# Altium PCB DCDC-Converter V1.0.PcbDoc
Units mm, origin at the board's own origin, x right, y up, seen from the top; angles counter-clockwise.
Board outline 130 x 100 mm, 2 copper layers (Top Layer, Bottom Layer); 36 components, 23 nets, 160 pads, 243 vias.
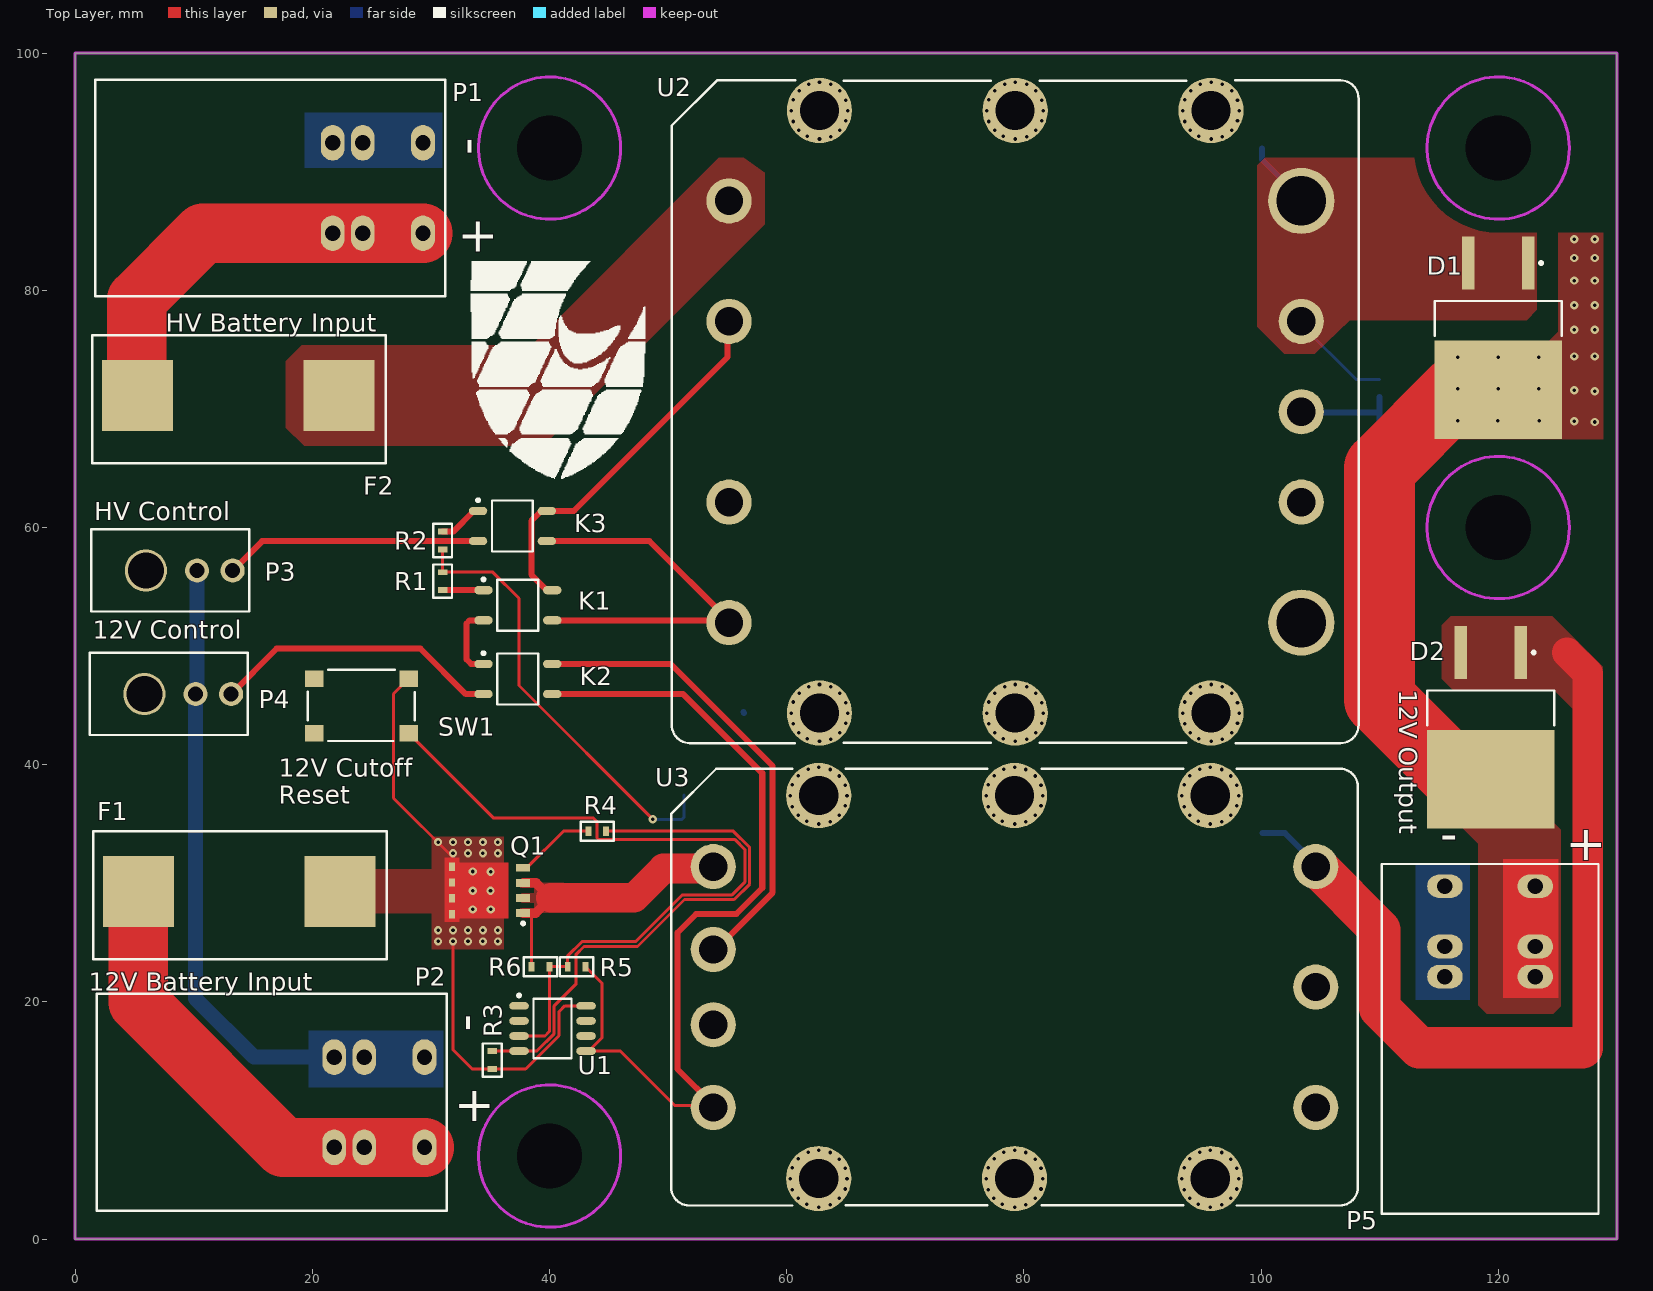
[diagram p0: Top Layer view]
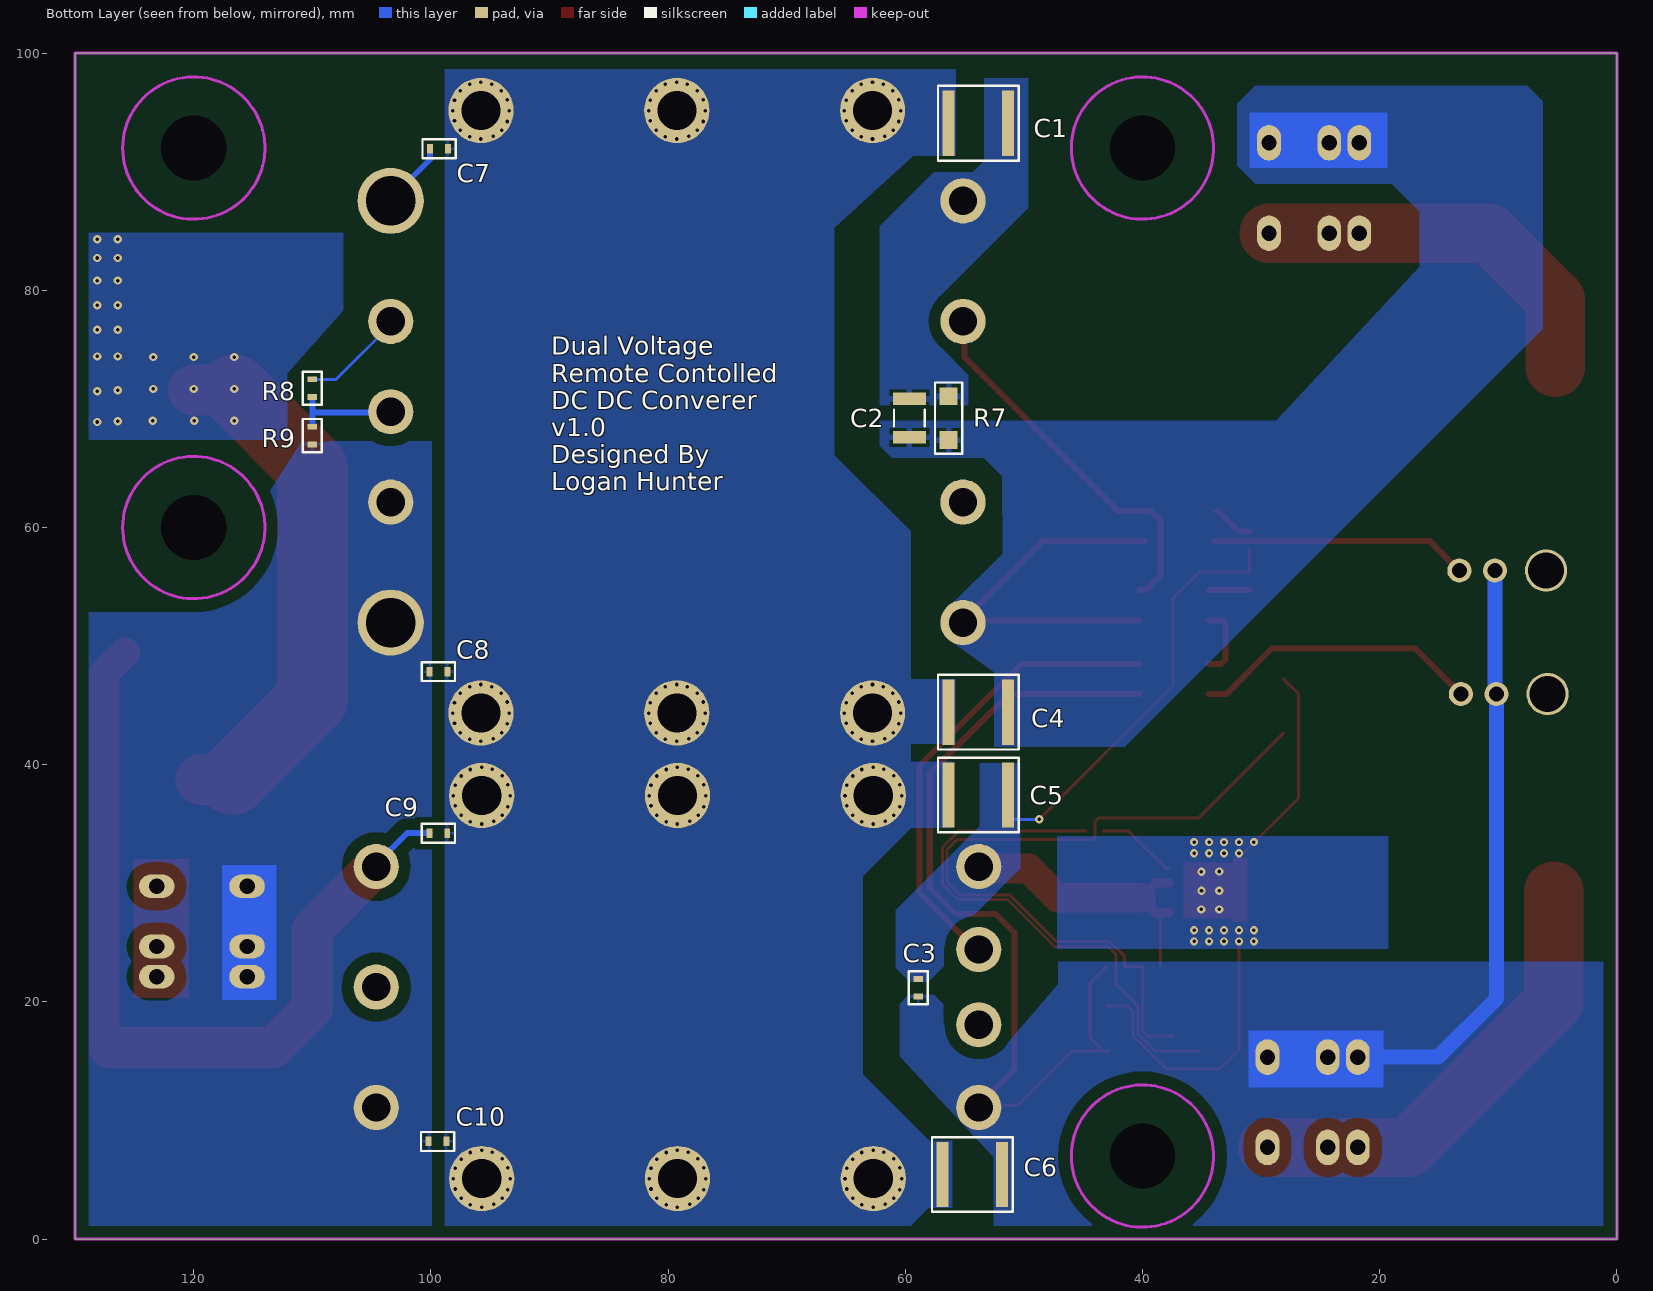
[diagram p1: Bottom Layer view, seen from below]
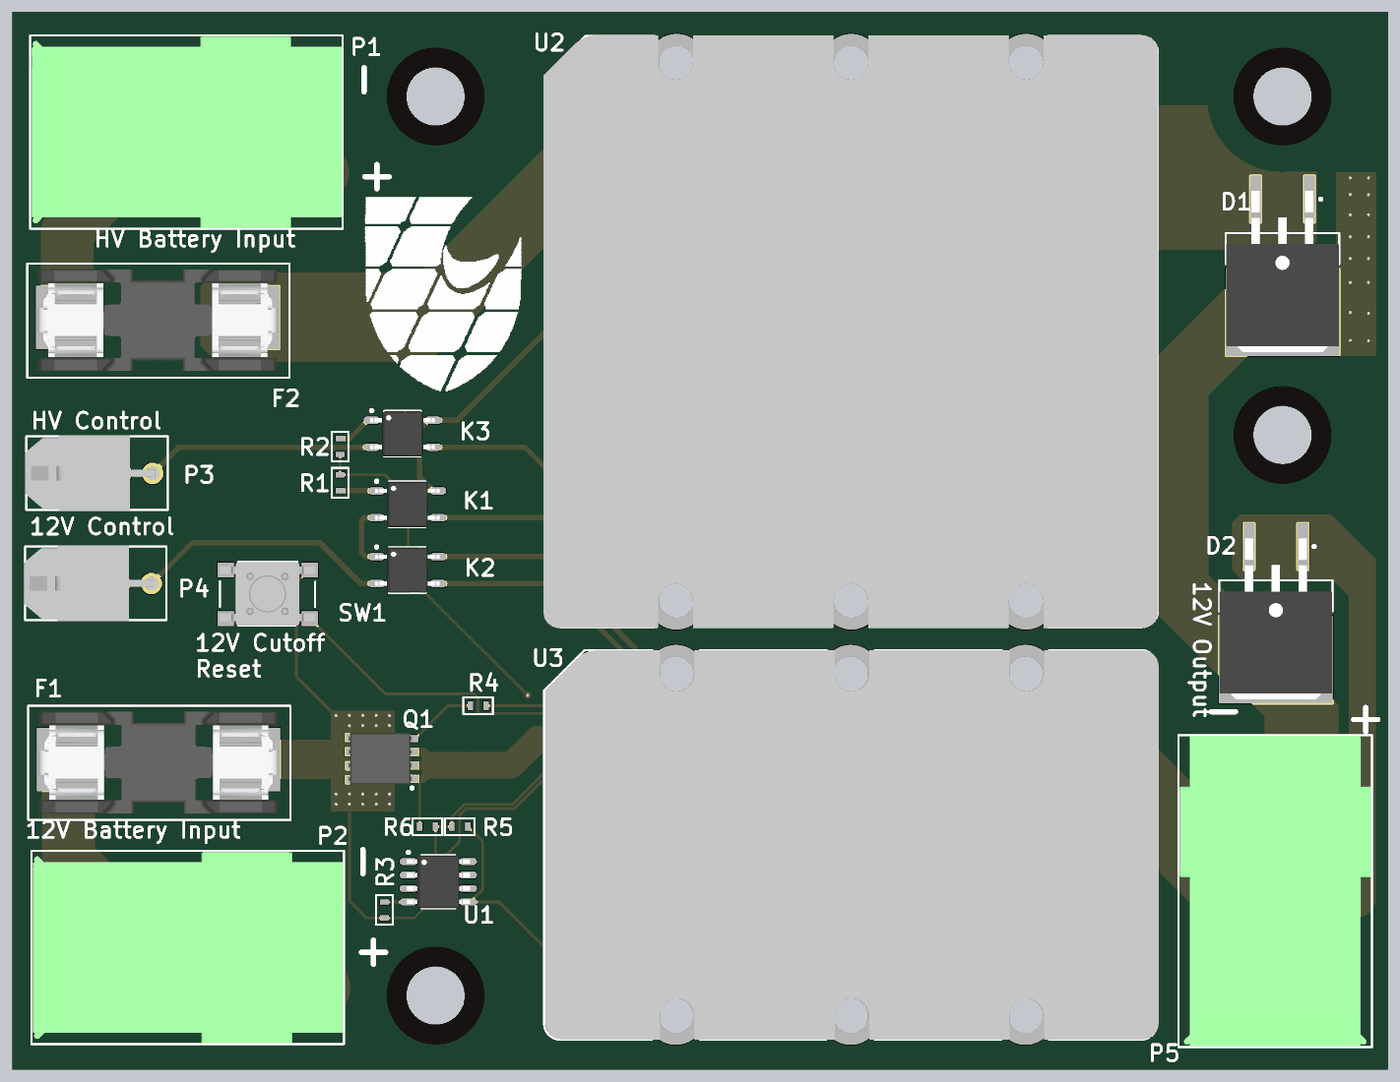
[diagram p2: 3D render of the assembled board from above, using the file's embedded part models]

## Layer stack, top to bottom
Top Solder: solder mask 0.0102, Solder Resist, Dk 3.5
Top Layer: signal copper 0.0356
Dielectric 1: dielectric 0.32, FR-4, Dk 4.8
Bottom Layer: signal copper 0.0356
Bottom Solder: solder mask 0.0102, Solder Resist, Dk 3.5

## Board outline
0,0 130,0 130,100 0,100

## Design rules (kind name [scope] priority, off if disabled: settings)
BoardOutlineClearance [All] p1: gap=0.3
Clearance [All] p1: gap=0.152 except(1: Arc-Poly Track-Poly SMDPad-Poly THPad-Poly Via-Poly Fill-Poly Poly-Poly)
ComponentClearance [All] p1: gap=0.1 collisioncheckmode=3 verticalgap=0.254 showdistances=FALSE
FabricationTestPointUsage TestPointUsage [All] p1: valid=0 allowmultiple=FALSE
FabricationTestpoint Testpoint [All] p1: side=3 testpointundercomponent=TRUE minsize=1.016 maxsize=2.54 preferedsize=1.524 minholesize=0 maxholesize=1.016 preferedholesize=0.813 testpointgrid=0.025 allowsidetop=TRUE allowsidebottom=TRUE usegrid=TRUE gridtolerance=0
HoleSize [All] p1: absolutevalues=TRUE maxlimit=6.3 minlimit=0.3 maxpercent=80.000 minpercent=20.000
HoleToHoleClearance [All] p1: gap=0.45 allowstackedmicrovias=TRUE
MinimumAnnularRing [All] p1: minimumring=0.15
MinimumSolderMaskSliver [All] p1: minsoldermaskwidth=0.075
PlaneClearance [All] p1: clearance=0.5
PlaneConnect [All] p1: planeconnectstyle=Direct reliefexpansion=0.508 reliefentries=4 reliefconductorwidth=0.254 reliefairgap=0.254
PolygonConnect FET-nothermal [InNet('VAUX+PASS')] p1: connectstyle=Direct reliefconductorwidth=0.254 reliefentries=4 polygonreliefangle="90 Angle" airgapwidth=0.254
PolygonConnect PolygonConnect-Via [isVia] p2: connectstyle=Direct reliefconductorwidth=0.254 reliefentries=4 polygonreliefangle="90 Angle" airgapwidth=0.254
PolygonConnect "PolygonConnect Fat No Thermals" [isPad && (not(IsThruPin)) && ((PadXSize_TopLayer * PadYSize_TopLayer) > 4)] p3: connectstyle=Direct reliefconductorwidth=0.254 reliefentries=4 polygonreliefangle="90 Angle" airgapwidth=0
PolygonConnect PolygonConnect-ThruPin [(IsThruPin && (HoleDiameter > 2))] p4: connectstyle=Direct reliefconductorwidth=0.5 reliefentries=4 polygonreliefangle="90 Angle" airgapwidth=0.25
PolygonConnect PolygonConnect-LargerThermals [isPad && (PadXSize_AllLayers * PadYSize_AllLayers) > 1] p5: connectstyle=Relief reliefconductorwidth=0.5 reliefentries=4 polygonreliefangle="90 Angle" airgapwidth=0.25 // GND Via Connection
PolygonConnect "GND Via" [isVia AND InNet('GND')] p6: connectstyle=Direct reliefconductorwidth=0.254 reliefentries=4 polygonreliefangle="90 Angle" airgapwidth=0.254 // GND Via Connection
PolygonConnect [All] p7: connectstyle=Relief reliefconductorwidth=0.25 reliefentries=4 polygonreliefangle="90 Angle" airgapwidth=0.25
RoutingVias [All] p1: holewidth=0.3 width=0.6 viastyle="Through Hole" minholewidth=0.3 minwidth=0.6 maxholewidth=6.3 maxwidth=6.6
SilkToSilkClearance [All] p1: silktosilkclearance=0.15
SilkToSolderMaskClearance SilkscreenOverComponentPads [IsPad] p1: minsilkscreentomaskgap=0.25 clearancetoexposedcopper=TRUE
SolderMaskExpansion [All] p1: expansion=0.1
Width [All] p1: maxlimit=10 minlimit=0.152 preferedwidth=0.25 minimp=50.000000 maximp=50.000000 favimp=50.000000
20 further rules are at their usual default settings.

## Classes and differential pairs
component class "DCDC Converter": C1 C3 C4 C5 C6 C7 C8 C9 C10 D1 D2 F1 F2 K1 K2 K3 P1 P2 P3 P4 P5 Q1 R1 R2 R3 R5 R6 R8 R9 SW1 U1 U2 U3

## Components (designator, comment, footprint, x,y, rotation, side; value= is the part's Value field where it differs from the comment)
C1 "X1-Y2 Capacitor" "Murata 2220 X1-Y2 Capacitor" 53.842,94.087 r0 bottom
C2 "SCH_GENERIC_CAPACITOR_1210" PCB_GENERIC_CAPACITOR_1210 59.65,69.225 r90 bottom
C3 "SCH_GENERIC_CAPACITOR_0603" PCB_GENERIC_SMD_0603 58.922,21.189 r90 bottom
C4 "X1-Y2 Capacitor" "Murata 2220 X1-Y2 Capacitor" 53.842,44.43 r180 bottom
C5 "X1-Y2 Capacitor" "Murata 2220 X1-Y2 Capacitor" 53.842,37.445 r0 bottom
C6 "X1-Y2 Capacitor" "Murata 2220 X1-Y2 Capacitor" 54.35,5.441 r180 bottom
C7 "SCH_GENERIC_CAPACITOR_0603" PCB_GENERIC_SMD_0603 99.314,91.948 r180 bottom
C8 "SCH_GENERIC_CAPACITOR_0603" PCB_GENERIC_SMD_0603 99.365,47.854 r0 bottom
C9 "SCH_GENERIC_CAPACITOR_0603" PCB_GENERIC_SMD_0603 99.375,34.225 r180 bottom
C10 "SCH_GENERIC_CAPACITOR_0603" PCB_GENERIC_SMD_0603 99.441,8.23 r0 bottom
D1 "SM74611 Smart Bypass Diode - TI" "SM74611 Smart Bypass Diode - TI" 120,76 r270 top
D2 "SM74611 Smart Bypass Diode - TI" "SM74611 Smart Bypass Diode - TI" 119.374,43.16 r270 top
F1 "Fuse" "Schurter 5x20mm Fuse Holder" 5.328,29.317 r0 top
F2 "Fuse" "Schurter 5x20mm Fuse Holder" 5.25,71.125 r0 top
K1 "SPST-NC Solid State Relay" "SPST-NC Solid State Relay - IXYS" 37.332,53.447 r0 top
K2 "SPST-NC Solid State Relay" "SPST-NC Solid State Relay - IXYS" 37.332,47.224 r0 top
K3 "SPST-NC Solid State Relay" "SPST-NC Solid State Relay - IXYS" 36.875,60.125 r0 top
P1 "Phoenix Contact 1720466" "Phoenix Contact 1720466" 29.331,84.816 r90 top
P2 "Phoenix Contact 1720466" "Phoenix Contact 1720466" 29.458,7.727 r90 top
P3 "SCH_MLX_1X2" PCB_MLX_MICROFIT_1X2 7.995,56.368 r270 top
P4 "SCH_MLX_1X2" PCB_MLX_MICROFIT_1X2 7.868,45.954 r270 top
P5 "Phoenix Contact 1720466" "Phoenix Contact 1720466" 123.125,29.75 r180 top
Q1 "INFINEON BSC030P03NS3 G" "BSC030P03NS3 G" 34.773,29.396 r0 top
R1 "SCH_GENERIC_RESISTOR_0603" PCB_GENERIC_SMD_0603 30.982,55.479 r90 top
R2 "SCH_GENERIC_RESISTOR_0603" PCB_GENERIC_SMD_0603 30.982,58.908 r270 top
R3 "SCH_GENERIC_RESISTOR_0603" PCB_GENERIC_SMD_0603 35.173,15.093 r270 top
R4 "SCH_GENERIC_RESISTOR_0603" PCB_GENERIC_SMD_0603 44.025,34.4 r180 top
R5 "SCH_GENERIC_RESISTOR_0603" PCB_GENERIC_SMD_0603 42.285,22.967 r0 top
R6 "SCH_GENERIC_RESISTOR_0603" PCB_GENERIC_SMD_0603 39.237,22.967 r180 top
R7 "SCH_GENERIC_RESISTOR_1206" PCB_GENERIC_SMD_1206 55.3,66.325 r90 bottom
R8 "SCH_GENERIC_RESISTOR_0603" PCB_GENERIC_SMD_0603 110,71.75 r90 bottom
R9 "SCH_GENERIC_RESISTOR_0603" PCB_GENERIC_SMD_0603 110,67.75 r90 bottom
SW1 "Tactile Switch" "C&K 4 pin Tactile Switch" 28.125,47.25 r180 top
U1 "Maxim MAX8212" "Maxim MAX8212" 40.253,17.76 r0 top
U2 "Vicor Mini" Vicor_Mini 79.265,69.762 r0 top
U3 "Vicor Micro" Vicor_Micro 79.209,21.248 r0 top

## Footprints (in the part's own frame and the unit in brackets; to place one, negate y for a bottom-side part, rotate by r counter-clockwise, add the part's x,y. Pads: shape width x height; smd on the part's side, far side on the other; paste and mask are expansions set on the pad)
"BSC030P03NS3 G" [mm] "P-Channel 30V 25.4A (Ta), 100A (Tc) 2.5W (Ta), 125W (Tc) Surface Mount PG-TDSON-8"
  rect 1.2x0.65 smd: 1(3,-1.905) 2(3,-0.635) 3(3,0.635) 4(3,1.905)
  rect 0.5x0.703 smd: 5(-3,1.999) 6(-3,0.666) 7(-3,-0.666) 8(-3,-1.999)
  Top Layer region: -2.75,-2.35 1.75,-2.35 1.75,2.35 -2.75,2.35
  silkscreen extent 2.88,-2.9 3.13,-2.65, body extent -3,-2.45 3,2.45, height 1
"C&K 4 pin Tactile Switch" [mm] "Digikey: CKN9085CT-ND MFG: PTS645SH50SMTR92 LFS"
  rect 1.55x1.4 smd mask+0.1: 1(0,4.6)
  rect 1.55x1.4 smd: 2(7.95,4.6) 3(0,0) 4(7.95,0)
  silkscreen extent -0.5,-0.75 8.5,5.25, body extent -0.5,-0.72 8.5,5.28, height 5
"Maxim MAX8212" [mm] "MFG: MAX8212CSA+ Digikey:  MAX8212CSA+-ND"
  oval 1.65x0.65 smd: 1(-2.825,1.905) 2(-2.825,0.635) 3(-2.825,-0.635) 4(-2.825,-1.905) 5(2.825,-1.905) 6(2.825,-0.635) 7(2.825,0.635) 8(2.825,1.905)
  silkscreen extent -2.95,-2.5 1.6,2.9, body extent -3,-2.5 3,2.5, height 1.75
"Murata 2220 X1-Y2 Capacitor" [mm] "Digikey: 490-3482-1-ND / MFG: GA355DR7GF472KW01L"
  rect 1x5.5 smd: 1(-2.5,0) 2(2.5,0)
  silkscreen extent -3.4,-3.15 3.4,3.15, body extent -2.84,-2.5 2.86,2.5, height 2
PCB_GENERIC_CAPACITOR_1210 [mm] "Chip Capacitor, 2-Leads, Body 3.20x2.50mm, IPC Medium Density"
  rect 1.05x2.8 smd: 1(-1.625,0) 2(1.625,0)
  silkscreen extent -0.7,-1.3 0.7,1.3, body extent -1.8,-1.4 1.8,1.4, height 2.2
PCB_GENERIC_SMD_0603 [mm]
  rect 0.5x0.8 smd: 1(-0.75,0) 2(0.75,0)
  silkscreen extent -1.4,-0.8 1.4,0.8, body extent -0.75,-0.5 0.75,0.5, height 0.45
PCB_GENERIC_SMD_1206 [mm] "Generic 1206 SMD footprint"
  rect 1.5x1.5 smd: 1(1.05,1.05) 2(4.75,1.05)
  silkscreen extent -0.1,-0.1 5.9,2.2
PCB_MLX_MICROFIT_1X2 [mil]
  round 80 hole 50: 1(0,90) 2(0,208)
  round 140 hole 120: ""(0,-80)
  silkscreen extent -138,-262 136,264, body extent -141,-266 140,216, height 345
"Phoenix Contact 1720466" [mm] "Digikey: 277-6070-ND / MFG: 1720466"
  oval 3x2 hole 1.3: 1(0,7.62) 1(0,5.08) 1(0,0) 2(7.62,0) 2(7.62,5.08) 2(7.62,7.62)
  silkscreen extent -5.33,-1.88 12.95,27.62, body extent -5.21,-1.78 12.83,27.47, height 14.26
"Schurter 5x20mm Fuse Holder" [mm] "MFG: 0031.8221, Digikey: 486-1260-ND"
  rect 6x6 smd: 1(0,0) 2(17,0)
  silkscreen extent -3.81,-5.71 20.95,5.08, body extent -2.84,-5.08 19.86,4.52, height 12
"SM74611 Smart Bypass Diode - TI" [mm] "Digikey: 296-35688-1-ND / MFG: SM74611KTTR"
  rect 4.45x1.05 smd: 1(-6.3,2.54) 3(-6.3,-2.54)
  rect 8.3x10.75 smd: 4(4.4,0)
  silkscreen extent -6.42,-5.35 -0.15,5.35, body extent -7.07,-5.33 8.17,5.33, height 5.08
"SPST-NC Solid State Relay - IXYS" [mm] "Digikey: CLA268CT-ND / MFG: CPC1117NTR"
  oval 1.55x0.7 smd: 1(-2.9,1.27) 2(-2.9,-1.27) 3(2.9,-1.27) 4(2.9,1.27)
  silkscreen extent -3.02,-2.15 1.73,2.3, body extent -3.05,-2.15 3.05,2.15, height 2.18
Vicor_Micro [mm]
  round 5.5 smd: 0(-16.51,-16.15) 0(-16.51,16.15) 0(0,-16.15) 0(0,16.15) 0(16.51,-16.15) 0(16.51,16.15)
  round 0 hole 3.3 unplated: 0(-16.51,-16.15) 0(-16.51,16.15) 0(0,-16.15) 0(0,16.15) 0(16.51,-16.15) 0(16.51,16.15)
  round 5.5 smd far side: 0(-16.51,-16.15) 0(-16.51,16.15) 0(0,-16.15) 0(0,16.15) 0(16.51,-16.15) 0(16.51,16.15)
  round 3.81 hole 2.388: 1(-25.4,10.16) 2(-25.4,3.175) 3(-25.4,-3.175) 4(-25.4,-10.16) 5(25.4,-10.16) 6(25.4,0) 7(25.4,10.16)
  silkscreen extent -28.96,-18.41 28.96,18.41, body extent -28.83,-18.41 29.08,18.41, height 12.7
Vicor_Mini [mm]
  round 5.5 smd: 0(-16.51,-25.4) 0(-16.51,25.4) 0(0,-25.4) 0(0,25.4) 0(16.51,-25.4) 0(16.51,25.4)
  round 0 hole 3.3 unplated: 0(-16.51,-25.4) 0(-16.51,25.4) 0(0,-25.4) 0(0,25.4) 0(16.51,-25.4) 0(16.51,25.4)
  round 5.5 smd far side: 0(-16.51,-25.4) 0(-16.51,25.4) 0(0,-25.4) 0(0,25.4) 0(16.51,-25.4) 0(16.51,25.4)
  round 3.81 hole 2.388: 1(-24.13,17.78) 2(-24.13,7.62) 3(-24.13,-7.62) 4(-24.13,-17.78) 6(24.13,-7.62) 7(24.13,0) 8(24.13,7.62)
  round 5.588 hole 4.166: 5(24.13,-17.78) 9(24.13,17.78)
  silkscreen extent -28.96,-27.94 28.96,27.94, body extent -29.08,-28.02 29,28.02, height 12.71

## Part data
C1 C4 C5 C6: library part "Murata 2220 X1-Y2 Capacitor"
C2: "Generic SMD capacitor 1210"
C3 C7 C8 C9 C10: "Generic SMD capacitor 0603"
Q1: library part "BSC030P03NS3 G", "P-Channel 30V 25.4A (Ta), 100A (Tc) 2.5W (Ta), 125W (Tc) Surface Mount PG-TDSON-8"
R1 R2 R3 R4 R5 R6 R8 R9: "Generic SMD resistor 0603"
R7: "Generic SMD resistor 1206"
SW1: library part "C&K Tactile Switch"

## Free pads (board coordinates)
  round 0 hole 5.5 unplated: ""(40,7) ""(40,92) ""(120,60) ""(120,92)

## Via types
v1: diameter 0.7, hole 0.3, Top Layer to Bottom Layer, 192 vias
v2: diameter 0.7, hole 0.3, Top Layer to Bottom Layer, tented both sides, 51 vias

## Nets (pads, with @x,y where several pads share a name; then routed paths per layer and width w, separated by ;. In a path a pad name is that pad's centre, name@x,y a point inside that pad or via, vN(x,y) a via of type N, cw(c..) or ccw(c..) an arc to the next point about the centre after c; other vN are vias at no path point)
CHASSIS: C1.2 C4.1 C5.2 C6.1 C7.2 C8.1 C9.2 C10.1 U2.0 U3.0 | length 0.1
  Bottom Layer w0.508: C4.1 C4.1@56.397,44.375
  other v1: 62.709,2.698 79.219,2.698 95.729,2.698 63.659,2.898 80.169,2.898 96.679,2.898 61.684,2.923 78.194,2.923 94.704,2.923 60.959,3.448 64.434,3.448 77.469,3.448 80.944,3.448 93.979,3.448 97.454,3.448 60.484,4.173 76.994,4.173 93.504,4.173 64.934,4.223 81.444,4.223 97.954,4.223 60.309,5.073 65.084,5.073 76.819,5.073 81.594,5.073 93.329,5.073 98.104,5.073 64.934,5.973 81.444,5.973 97.954,5.973 60.484,6.023 76.994,6.023 93.504,6.023 64.434,6.748 80.944,6.748 97.454,6.748 60.984,6.773 77.494,6.773 94.004,6.773 63.659,7.298 80.169,7.298 96.679,7.298 61.809,7.323 78.319,7.323 94.829,7.323 62.709,7.498 79.219,7.498 95.729,7.498 62.709,34.998 79.219,34.998 95.729,34.998 63.659,35.198 80.169,35.198 96.679,35.198 61.684,35.223 78.194,35.223 94.704,35.223 60.959,35.748 64.434,35.748 77.469,35.748 80.944,35.748 93.979,35.748 97.454,35.748 60.484,36.473 76.994,36.473 93.504,36.473 64.934,36.523 81.444,36.523 97.954,36.523 60.309,37.373 65.084,37.373 76.819,37.373 81.594,37.373 93.329,37.373 98.104,37.373 64.934,38.273 81.444,38.273 97.954,38.273 60.484,38.323 76.994,38.323 93.504,38.323 64.434,39.048 80.944,39.048 97.454,39.048 60.984,39.073 77.494,39.073 94.004,39.073 63.659,39.598 80.169,39.598 96.679,39.598 61.809,39.623 78.319,39.623 94.829,39.623 62.709,39.798 79.219,39.798 95.729,39.798 62.765,41.962 79.275,41.962 95.785,41.962 63.715,42.162 80.225,42.162 96.735,42.162 61.74,42.187 78.25,42.187 94.76,42.187 61.015,42.712 64.49,42.712 77.525,42.712 81,42.712 94.035,42.712 97.51,42.712 60.54,43.437 77.05,43.437 93.56,43.437 64.99,43.487 81.5,43.487 98.01,43.487 60.365,44.337 65.14,44.337 76.875,44.337 81.65,44.337 93.385,44.337 98.16,44.337 64.99,45.237 81.5,45.237 98.01,45.237 60.54,45.287 77.05,45.287 93.56,45.287 64.49,46.012 81,46.012 97.51,46.012 61.04,46.037 77.55,46.037 94.06,46.037 63.715,46.562 80.225,46.562 96.735,46.562 61.865,46.587 78.375,46.587 94.885,46.587 62.765,46.762 79.275,46.762 95.785,46.762 62.765,92.762 79.275,92.762 95.785,92.762 63.715,92.962 80.225,92.962 96.735,92.962 61.74,92.987 78.25,92.987 94.76,92.987 61.015,93.512 64.49,93.512 77.525,93.512 81,93.512 94.035,93.512 97.51,93.512 60.54,94.237 77.05,94.237 93.56,94.237 64.99,94.287 81.5,94.287 98.01,94.287 60.365,95.137 65.14,95.137 76.875,95.137 81.65,95.137 93.385,95.137 98.16,95.137 64.99,96.037 81.5,96.037 98.01,96.037 60.54,96.087 77.05,96.087 93.56,96.087 64.49,96.812 81,96.812 97.51,96.812 61.04,96.837 77.55,96.837 94.06,96.837 63.715,97.362 80.225,97.362 96.735,97.362 61.865,97.387 78.375,97.387 94.885,97.387 62.765,97.562 79.275,97.562 95.785,97.562
EN1: K3.2 P3.2 | length 21.7
  Top Layer w0.508: P3.2 15.765,58.855 K3.2
EN2: K2.2 P4.2 | length 24.5
  Top Layer w0.508: P4.2 16.997,49.8 29.1,49.8 32.946,45.954 K2.2
GND: C8.2 C10.2 P5.2 R9.1 U2.5 U2.6 U3.5
NetC1_1: C1.1 C2.2 F2.2 R7.2 U2.1
NetF1_2: F1.2 Q1.5 Q1.6 Q1.7 Q1.8 R3.2 SW1.3 U1.8 | length 42.9
  Top Layer w0.254: SW1.3 26.85,45.975 26.85,37.175 31.773,32.252 Q1.5 ; v2@31.875,25.125 31.875,15.95 33.482,14.343 R3.2 37.993,14.343 39.444,15.795 40.8,17.15 40.8,19.175 41.29,19.665 U1.8
  other v2: 30.6,25.1 31.862,25.1 33.125,25.1 34.387,25.1 35.65,25.1 30.6,26.05 31.862,26.05 33.125,26.051 34.387,26.051 35.65,26.05 33.524,27.795 35.044,27.795 33.514,29.382 35.025,29.382 33.519,30.996 35.029,30.986 31.862,32.525 33.125,32.525 34.387,32.525 35.65,32.525 30.6,33.475 31.862,33.476 33.125,33.476 34.387,33.476 35.65,33.475
NetK1_1: K1.1 R1.1 | length 4.3
  Top Layer w0.508: R1.1 K1.1@34.42,54.729 ; 33.522,54.717 K1.1
NetK1_2: K1.2 K2.1 | length 6.2
  Top Layer w0.508: K2.1 33.395,48.494 33,48.889 33,51.909 33.268,52.177 K1.2
NetK3_1: K3.1 R2.1 | length 3.7
  Top Layer w0.254: K3.1@33.62,61.395 K3.1
  Top Layer w0.508: R2.1 31.883,59.658 K3.1@33.62,61.395
NetQ1_4: Q1.4 R4.2 | length 6.8
  Top Layer w0.254: Q1.4 38.076,31.301 41.175,34.4 R4.2
NetR3_1: R3.1 R4.1 U1.4 | length 46.1
  Top Layer w0.254: R3.1 37.416,15.843 U1.4 38.93,15.855 40.393,17.318 40.393,19.668 42.25,21.525 42.25,24.025 42.9,24.675 47.425,24.675 51.375,28.625 55.575,28.625 56.875,29.925 56.875,33.025 55.5,34.4 R4.1
NetR5_1: R5.1 R6.1 SW1.1 U1.3 | length 65.5
  Top Layer w0.254: SW1.1 35.25,35.525 43.675,35.525 44,35.2 44,33.825 44.15,33.675 55.65,33.675 56.469,32.857 56.469,30.093 55.407,29.031 51.207,29.031 47.257,25.081 42.731,25.081 41.535,23.885 R5.1 R6.1 39.987,17.494 ; U1.3 39.618,17.125 39.987,17.494 ; 39.987,18.888 39.987,17.494
NetR8_1: R8.1 R9.2 U2.7 | length 9.2
  Bottom Layer w0.508: U2.7@103.372,69.957 103.629,69.7 110,69.7 ; R9.2 110,69.7 ; R8.1 110,69.7
PC1: K1.4 K3.4 U2.2 | length 32.3
  Top Layer w0.508: K1.4 39.783,54.717 38.475,56.025 38.475,60.559 39.311,61.395 42.045,61.395 55.01,74.36 55.01,77.475 U2.2@55.112,77.577
PC2: K2.4 U3.2 | length 39.3
  Top Layer w0.508: K2.4 50.206,48.494 58.813,39.887 58.813,29.208 U3.2@54.223,24.618
VAUX+: F1.1 P2.1 | length 38.5
  Top Layer w5: F1.1 5.328,19.972 17.573,7.727 21.838,7.727 24.378,7.727 P2.1@29.458,7.727
VAUX+PASS: C3.2 C5.1 Q1.1 Q1.2 Q1.3 R1.2 R2.2 R6.2 U3.1 | length 62.7
  Top Layer w0.254: R2.2 R1.2 35.221,56.229 37.425,54.025 37.425,46.675 v2(48.7,35.4) ; R6.2 38.487,27.137 38.841,27.491
  Top Layer w0.8: Q1.1 38.841,27.491 40.125,28.775 38.869,30.031 Q1.3
  Top Layer w2.5: 40.125,28.775 47.125,28.775 49.6,31.25 54.095,31.25 U3.1@54.148,31.303
  Bottom Layer w0.254: v2(48.7,35.4) 51.175,35.4 51.342,35.567 C5.1
VAUX-: C3.1 C6.2 K2.3 P2.2 P3.1 P4.1 R5.2 U1.5 U3.4 | length 126
  Top Layer w0.254: U1.5@42.85,15.855 U1.5 U1.5@43.306,15.855 ; R5.2 44.444,21.558 44.444,16.993 U1.5@43.306,15.855 ; U3.4@53.842,11.283 50.54,11.283 45.968,15.855 U1.5@43.306,15.855
  Top Layer w0.508: P3.1@10.154,56.241 P3.1 ; K2.3 51.271,45.954 57.938,39.287 57.938,29.601 55.75,27.413 52.363,27.413 50.794,25.844 50.794,14.331 U3.4@53.842,11.283
  Bottom Layer w0.508: P3.1@10.154,56.241 P3.1
  Bottom Layer w1.27: P3.1 10.281,46.081 P4.1 10.154,20.271 15.078,15.347 P2.2@21.838,15.347
VBATT+: F2.1 P1.1 | length 32.2
  Top Layer w5: F2.1@5.201,73.513 5.201,79.228 10.789,84.816 21.711,84.816 24.251,84.816 P1.1@29.331,84.816
VBATT-: C2.1 C4.2 K1.3 K3.3 P1.2 R7.1 U2.4 | length 33
  Top Layer w0.508: K3.3@39.776,58.856 48.433,58.856 55.112,52.177 K1.3
VOUT: D1.4 D2.4 P5.1 | length 44.4
  Top Layer w4.318: D1.4@116.6,71.6 D1.4 ; D2.4@116.74,38.76 D2.4
  Top Layer w6: D1.4@116.6,71.6 110,65 110,45.5 D2.4@116.74,38.76
  other v2: 128.125,68.9 126.4,68.95 116.575,69 119.95,69 123.45,69 128.125,71.5 126.4,71.575 116.575,71.687 120,71.687 123.425,71.687 116.575,74.375 120,74.375 123.425,74.375 126.4,74.425 128.125,74.425 126.4,76.675 128.125,76.675 126.4,78.75 128.125,78.75 126.4,80.825 128.125,80.825 126.4,82.725 128.125,82.725 126.4,84.3 128.125,84.3
VOUT1: C7.1 D1.1 D1.3 R8.2 U2.8 U2.9 | length 14.6
  Top Layer w2.54: U2.9@103.372,87.737 U2.9@103.422,87.687
  Bottom Layer w0.254: U2.8@103.372,77.577 103.372,77.128 108,72.5 R8.2
  Bottom Layer w0.508: 100.064,91.045 C7.1 ; 100.076,91.033 U2.9@103.372,87.737
VOUT2: C9.1 D2.1 D2.3 U3.7 | length 72.5
  Top Layer w2.54: 125.79,49.46 127.55,47.7 127.55,16.625 127.075,16.15
  Top Layer w3.5: U3.7@104.642,31.476 110.025,26.093 110.025,19.45 113.325,16.15 127.075,16.15
  Bottom Layer w0.508: C9.1 102.02,34.225 U3.7@104.642,31.603
pads on no net: P3. P4. SW1.2 SW1.4 U1.1 U1.2 U1.6 U1.7 U2.3 U3.3 U3.6

## Polygon pours and split planes (outlines as drawn)
VAUX- on Bottom Layer "VAUX-" (solid, remove dead copper, pour order 26): 52.553,0 52.553,6.914 60.483,15.422 60.483,19.8 59.683,20.599 57.599,20.599 56.8,19.8 56.8,18.241 51.71,16.136 47.111,21.507 47.111,23.378 0,23.378 0,0
NetF1_2 on Bottom Layer "Top Layer-No Net" (solid, pour order 0): 19.288,24.474 47.185,24.474 47.185,33.956 19.288,33.956
VAUX+PASS on Bottom Layer "AUXDCDCIN+" (solid, remove dead copper, pour order 28): 53.715,40.112 50.286,40.112 50.286,31.25 54.136,27.4 56.762,24.562 56.762,22.988 58.05,21.7 59.625,21.7 60.8,22.875 60.8,27.719 53.715,34.804 53.715,36.048
NetC1_1 on Bottom Layer "BATDCDCIN+" (solid, remove dead copper, pour order 24): 62.15,85.398 57.605,89.943 54.325,89.943 53.334,90.934 53.334,97.897 49.651,97.897 49.651,86.974 57.175,79.45 57.675,77.4 57.075,75.225 54.675,72.825 54.675,70.325 62.15,70.325
VBATT- on Bottom Layer "VBATT-" (solid, remove dead copper, pour order 22): 52.5,41.5 52.5,47.786 56,50.336 56,53.6 51.803,57.797 51.806,64.306 53.4,65.9 61.15,65.9 62.15,66.9 62.15,69 60.999,69 58.5,69 28.71,69 16.625,82 16.625,86.625 19,89 32,89 30.5,89 32,90.5 32,95.75 30.5,97.25 7.541,97.25 6.25,95.959 6.25,76.75 18.123,64.877 41.5,41.5
CHASSIS on Bottom Layer "CHAISSIS" (solid, remove dead copper, pour order 20): 55.795,96.881 55.795,91.42 59.224,91.42 59.224,96.881
CHASSIS on Bottom Layer "CHASSIS" (solid, remove dead copper, pour order 18): 55.795,47.224 55.795,41.763 59.557,41.763 59.557,47.224
CHASSIS on Bottom Layer "CHAISSIS" (solid, remove dead copper, pour order 16): 56.053,8.299 56.053,2.647 59.228,2.647 59.228,8.299 56.18,8.299
CHASSIS on Bottom Layer "CHAISSIS" (solid, remove dead copper, pour order 14): 56.128,40.239 56.128,34.696 59.557,34.696 59.557,40.239
CHASSIS on Bottom Layer "CHASSIS" (solid, remove dead copper, pour order 10): 98.831,98.659 98.831,0 60.658,0 58.033,2.625 58.033,8.325 63.6,13.892 63.6,30.609 59.557,34.652 59.557,59.67 66,66.113 66,85.263 59.317,91.338 55.728,91.338 55.728,98.659
GND on Bottom Layer "GND - BOTTOM" (solid, remove dead copper, pour order 8): 99.943,0 130,0 130,52.875 120.175,52.875 110.86,67.275 99.943,67.275
VOUT on Bottom Layer "VOUT" (solid, remove dead copper, pour order 40): 133.175,67.4 133.175,84.85 107.375,84.85 107.375,78.337 112.1,73.022 112.1,71.475 112.1,67.4
NetF1_2 on Top Layer "Top Layer-No Net" (solid, pour order 48): 20.854,31.179 20.854,27.485 30.08,27.485 30.08,24.422 36.138,24.422 36.138,33.942 30.08,33.942 30.08,31.179
NetC1_1 on Top Layer "HV" (solid, remove dead copper, pour order 34): 19.125,75.375 17.774,74.024 17.774,68.433 19.298,66.909 39.491,66.909 58.16,85.578 58.16,89.896 56.382,91.166 54.291,91.166 38.5,75.375
VOUT1 on Top Layer "VOUT1" (solid, remove dead copper, pour order 32): 99.689,76.942 99.689,90.531 100.324,91.166 113.05,91.166 116.05,86.425 119.76,84.875 123.25,84.875 123.25,78.343 122.403,77.495 107.493,77.495 104.515,74.656 101.975,74.656
VOUT2 on Top Layer "VOUT2" (solid, remove dead copper, pour order 38): 116.25,46.25 124.75,46.25 127.25,43.75 128.82,43.75 128.82,48.24 124.56,52.5 116,52.5 115.25,51.75 115.25,47.25
VOUT on Top Layer "VOUT" (solid, pour order 42): 130.85,67.45 116,67.45 125.075,76.525 125.075,84.85 125.3,84.85 130.85,84.85
VOUT on Top Layer "VOUT" (solid, remove dead copper, pour order 46): 115.85,35.825 118.325,33.35 118.325,19.725 119.05,19 124.65,19 125.375,19.725 125.375,34.4 123.95,35.825
VAUX+PASS on Top Layer "VAUX+PASS" (solid, pour order 50): 37.15,27.15 37.15,27.9 38.7,27.9 38.7,28.375 37.65,28.375 37.525,28.45 37.525,29.075 37.65,29.15 38.7,29.15 38.7,29.625 37.15,29.625 37.15,30.375 38.5,30.375 38.85,30.025 41.21,30.025 41.697,28.775 41.697,27.525 38.875,27.525 38.5,27.15

## Keep-outs
Keep-Out Layer:
  circle w0.254: c120,60 r6
  circle w0.254: c120,92 r6
  circle w0.254: c40,92 r6
  circle w0.254: c40,7 r6
  lines w0.254: 0,0 0,100 130,100 130,0 0,0

## Other copper
Top Layer:
  rectangle net VOUT: 120.4,20.325 125.1,32.05
  rectangle net VOUT2: 128.345,16.068 128.82,16.793
  rectangle net NetF1_2: 31.125,26.725 32.425,32.175
Bottom Layer:
  rectangle net GND: 113.005,20.142 117.602,31.547
  rectangle net VBATT-: 19.325,90.325 30.975,94.975
  rectangle net VAUX-: 19.675,12.775 31.075,17.6

## Silkscreen, mask and mechanical layers (free items; w line width, h text height)
Top Overlay:
  drawing of 711 lines, arcs and shapes, not listed
  text "-" at 34.425,91.4 h3 r90
  text "+" at 32.275,83.25 h3
  text "HV Battery Input" at 7.625,76.5 h1.52
  text "HV Control" at 1.625,60.625 h1.52
  text "12V Control" at 1.5,50.625 h1.52
  text "12V Output" at 111.65,46.325 h1.52 r270
  text "12V Cutoff / Reset" at 17.175,36.7 h1.52
  text "-" at 116.6,35 h3 r180
  text "+" at 125.675,31.925 h3
  text "12V Battery Input" at 1.15,20.95 h1.52
  text "-" at 34.3,17.475 h3 r90
  text "+" at 31.95,9.925 h3
Bottom Overlay:
  text "Dual Voltage / Remote Contolled / DC DC Converer / v1.0 / Designed By / Logan Hunter" at 89.875,63.125 h1.52
Top Solder:
  circle w0.254: c40,92 r4.5
  circle w0.254: c40,7 r4.5
  circle w0.254: c120,92 r4.5
  circle w0.254: c120,60 r4.5
  region: 115.5,60 ccw(c120,60) 120,55.5 ccw(c120,60) 124.5,60 ccw(c120,60) 120,64.5 ccw(c120,60)
  region: 115.5,92 ccw(c120,92) 120,87.5 ccw(c120,92) 124.5,92 ccw(c120,92) 120,96.5 ccw(c120,92)
  region: 40,87.5 cw(c40,92) 35.5,92 cw(c40,92) 40,96.5 cw(c40,92) 44.5,92 cw(c40,92)
  region: 35.5,7 ccw(c40,7) 40,2.5 ccw(c40,7) 44.5,7 ccw(c40,7) 40,11.5 ccw(c40,7)
Bottom Solder:
  region: 40,87.5 cw(c40,92) 35.5,92 cw(c40,92) 40,96.5 cw(c40,92) 44.5,92 cw(c40,92)
  region: 35.5,7 ccw(c40,7) 40,2.5 ccw(c40,7) 44.5,7 ccw(c40,7) 40,11.5 ccw(c40,7)
  region: 115.5,60 ccw(c120,60) 120,55.5 ccw(c120,60) 124.5,60 ccw(c120,60) 120,64.5 ccw(c120,60)
  region: 115.5,92 ccw(c120,92) 120,87.5 ccw(c120,92) 124.5,92 ccw(c120,92) 120,96.5 ccw(c120,92)